# Altium PCB PA_CPLBridgre_R00.PcbDoc
Units mil, origin at the board's own origin, x right, y up, seen from the top; angles counter-clockwise.
Board outline 885.83 x 1760 mil, 2 copper layers (Top Layer, Bottom Layer); 18 components, 13 nets, 62 pads, 242 vias.
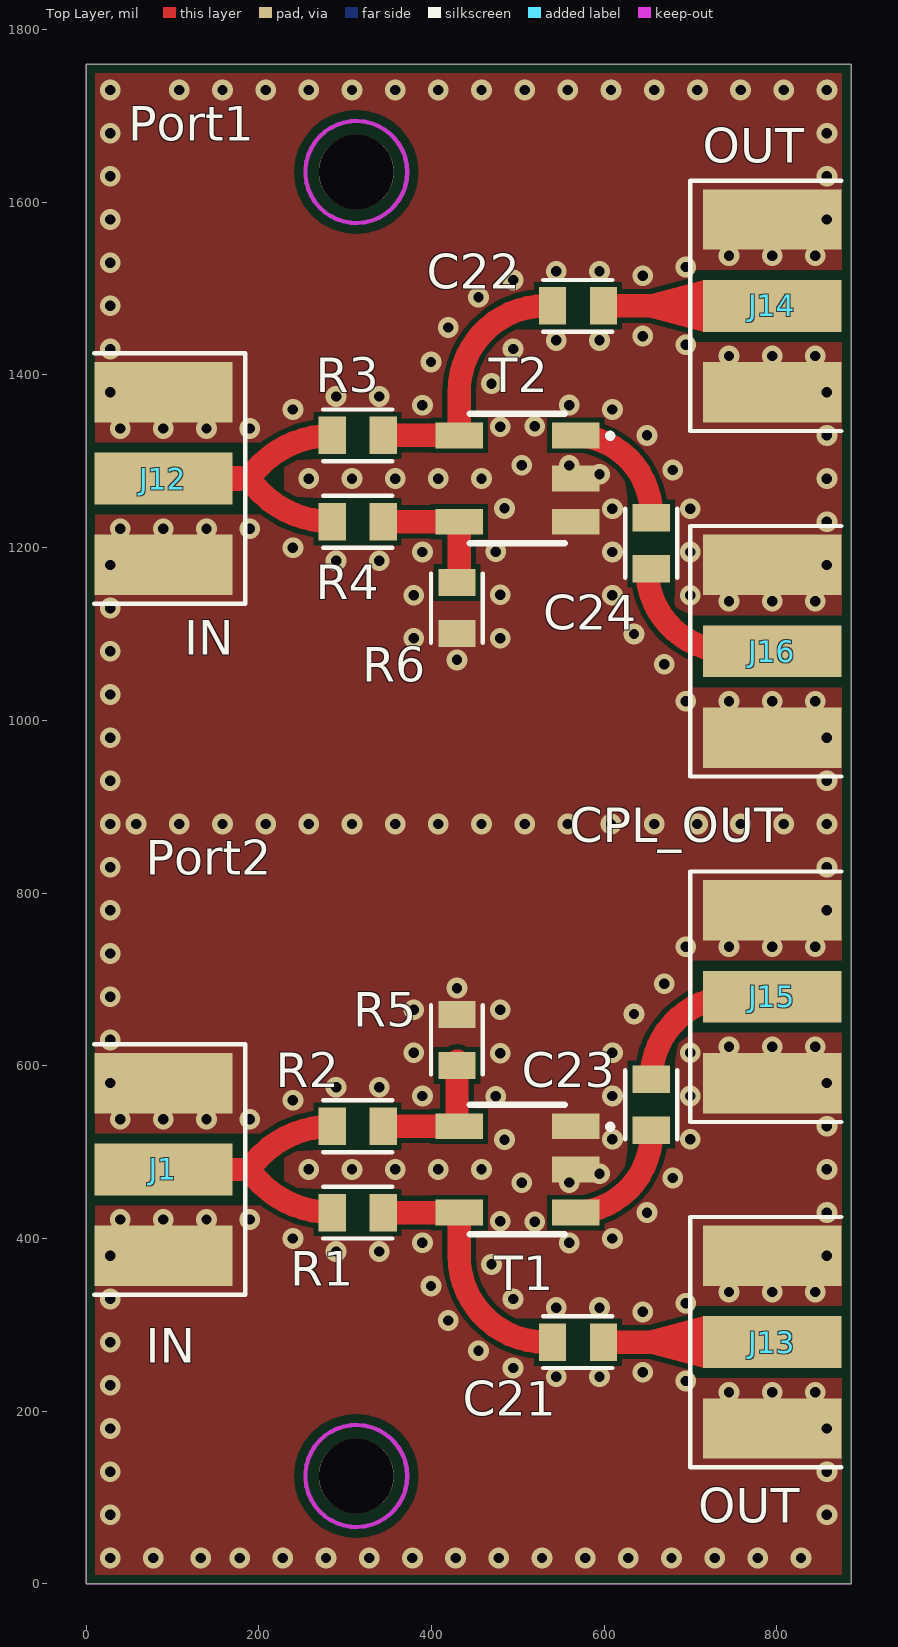
[diagram p0: Top Layer view]
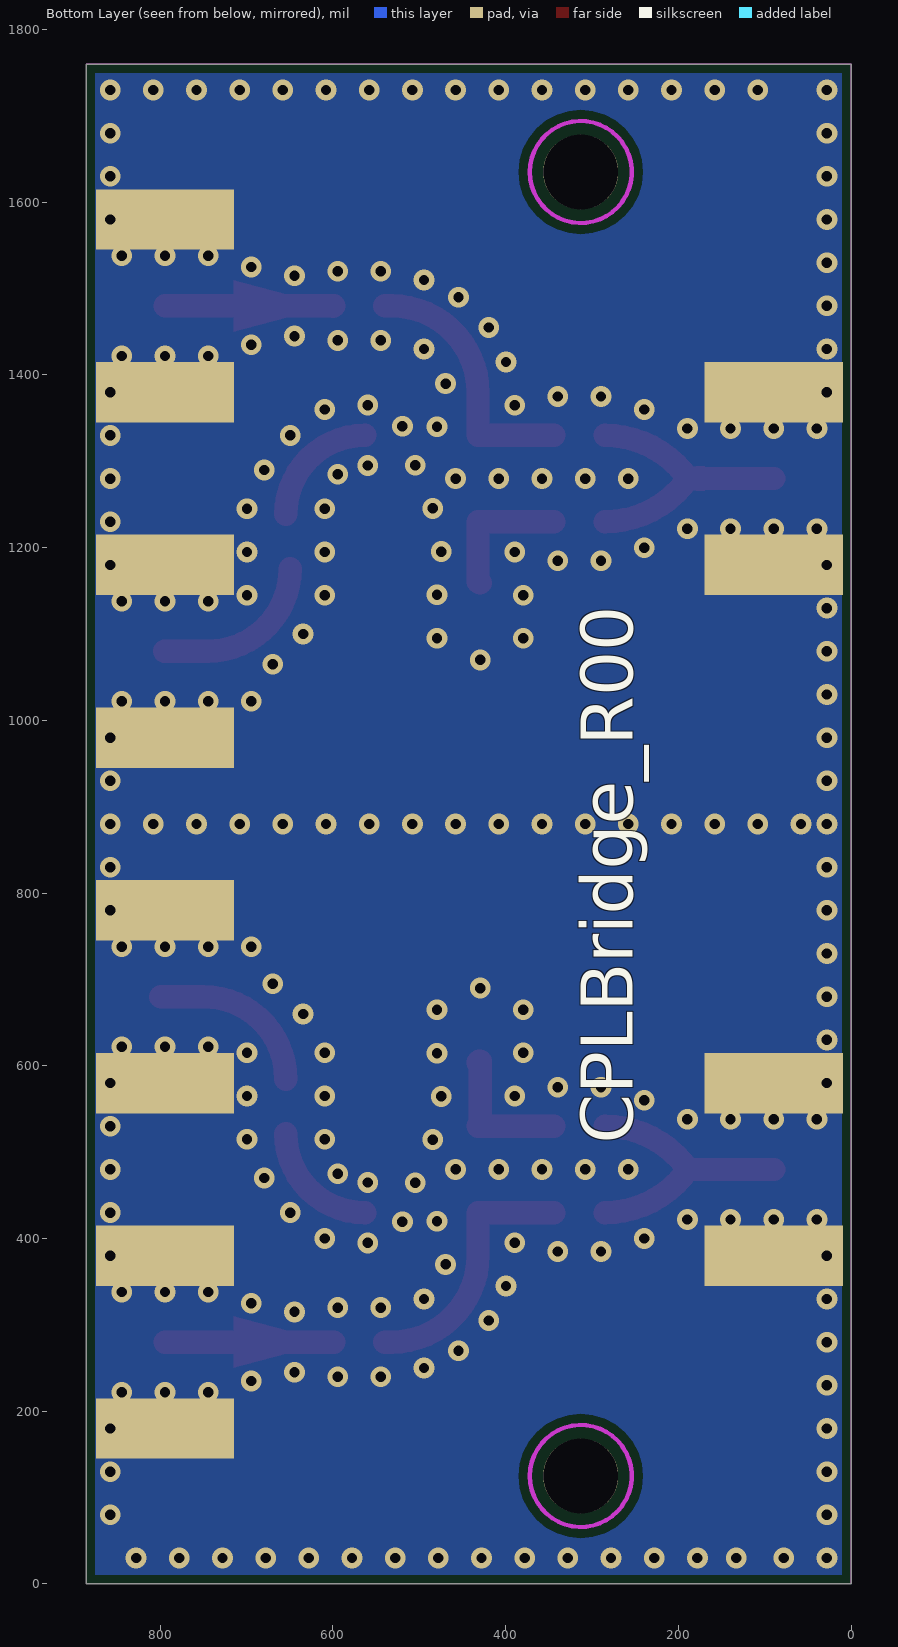
[diagram p1: Bottom Layer view, seen from below]

## Layer stack, top to bottom
Top Solder: solder mask 0.4, Solder Resist, Dk 3.5
Top Layer: signal copper 1.4
Dielectric 1: dielectric 12.6, FR-4, Dk 4.8
Bottom Layer: signal copper 1.4
Bottom Solder: solder mask 0.4, Solder Resist, Dk 3.5

## Board outline
0,0 0,1760 885.83,1760 885.83,0

## Design rules (kind name [scope] priority, off if disabled: settings)
AssemblyTestpoint [All] p1: testpointundercomponent=TRUE minsize=40 maxsize=100 preferedsize=60 minholesize=0 maxholesize=40 preferedholesize=32 testpointgrid=1 usegrid=TRUE gridoriginx=358.41 gridoriginy=0 gridtolerance=0.01 allowsidetop=TRUE allowsidebottom=TRUE
Clearance SMA_Clearance [(HasFootprint('SMA_Connector') AND  Not InNet('GND'))] p1: gap=12 ignorepadtopadclearanceinfootprint=FALSE
Clearance Clearance_1 [OnMid vs OnMid] p2: gap=6 ignorepadtopadclearanceinfootprint=FALSE sourcerule=40 cellrowname=All cellrowtype=0 cellcolname=All cellcoltype=0 innerlayers=TRUE
Clearance Clearance_2 [(ExistsOnLayer('Top Layer') Or ExistsOnLayer('Bottom Layer')) vs (ExistsOnLayer('Top Layer') Or ExistsOnLayer('Bottom Layer'))] p3: gap=6 ignorepadtopadclearanceinfootprint=FALSE sourcerule=40 cellrowname=All cellrowtype=0 cellcolname=All cellcoltype=0 outerlayers=TRUE
Clearance [All] p4: gap=10 ignorepadtopadclearanceinfootprint=FALSE ismatrix=TRUE
FabricationTestpoint [All] p1: side=3 testpointundercomponent=TRUE minsize=40 maxsize=100 preferedsize=60 minholesize=0 maxholesize=40 preferedholesize=32 testpointgrid=1 allowsidetop=TRUE allowsidebottom=TRUE usegrid=TRUE gridoriginx=358.41 gridoriginy=0 gridtolerance=0.01
PolygonConnect PolygonConnectStyle_1 [All] p1: thpad.connectstyle=Relief thpad.reliefconductorwidth=10 thpad.reliefentries=2 thpad.polygonreliefangle="0 Angle" thpad.airgapwidth=10 smdpad.connectstyle=Direct smdpad.reliefconductorwidth=10 smdpad.reliefentries=2 smdpad.polygonreliefangle="0 Angle" smdpad.airgapwidth=10 via.connectstyle=Direct via.reliefconductorwidth=10 via.reliefentries=2 via.polygonreliefangle="0 Angle" via.airgapwidth=10
PolygonConnect [All] p2: thpad.connectstyle=Relief thpad.reliefconductorwidth=10 thpad.reliefentries=4 thpad.polygonreliefangle="90 Angle" thpad.airgapwidth=10 smdpad.connectstyle=Direct smdpad.reliefconductorwidth=10 smdpad.reliefentries=4 smdpad.polygonreliefangle="90 Angle" smdpad.airgapwidth=10 via.connectstyle=Relief via.reliefconductorwidth=10 via.reliefentries=4 via.polygonreliefangle="90 Angle" via.airgapwidth=10
RoutingVias RoutingViaStyle_1 [All] p1: holewidth=12 width=24 viastyle="Through Hole" minholewidth=12 minwidth=24 maxholewidth=50 maxwidth=100
RoutingVias [All] p2: holewidth=28 width=50 viastyle="Through Hole" minholewidth=28 minwidth=50 maxholewidth=28 maxwidth=50
SolderMaskExpansion [All] p1: expansion=4 istentingtop=FALSE
Width MaxMinWidth_1 [All] p1: maxlimit=100 minlimit=6 preferedwidth=27 minimp=50.000000 maximp=50.000000 favimp=50.000000
Width [All] p2: maxlimit=10 minlimit=10 preferedwidth=10
28 further rules are at their usual default settings.

## Components (designator, comment, footprint, x,y, rotation, side; value= is the part's Value field where it differs from the comment)
C21 "100nF - RF" C_0603 569.5,280 r0 top
C22 "100nF - RF" C_0603 569.5,1480 r0 top
C23 "100nF - RF" C_0603 654.5,555 r270 top
C24 "100nF - RF" C_0603 654.5,1205 r90 top
J1 "SMA_Connector" SMA_Connector 89.5,480 r90 top
J12 "SMA_Connector" SMA_Connector 89.5,1280 r90 top
J13 "SMA_Connector" SMA_Connector 794.5,280 r270 top
J14 "SMA_Connector" SMA_Connector 794.5,1480 r270 top
J15 "SMA_Connector" SMA_Connector 794.5,680 r270 top
J16 "SMA_Connector" SMA_Connector 794.5,1080 r270 top
R1 "50R - RF" R_0603 314.5,430 r180 top
R2 "50R - RF" R_0603 314.5,530 r180 top
R3 "50R - RF" R_0603 314.5,1330 r180 top
R4 "50R - RF" R_0603 314.5,1230 r180 top
R5 "50R - RF" R_0603 429.5,630 r270 top
R6 "50R - RF" R_0603 429.5,1130 r90 top
T1 "MABA-007159-000000" MABA-007159-000000_1 499.5,480 r270 top
T2 "MABA-007159-000000" MABA-007159-000000_1 499.5,1280 r270 top

## Footprints (in the part's own frame and the unit in brackets; to place one, negate y for a bottom-side part, rotate by r counter-clockwise, add the part's x,y. Pads: shape width x height; smd on the part's side, far side on the other; paste and mask are expansions set on the pad)
C_0603 [mm] "Chip Capacitor, 2-Leads,"
  rect 0.8x1.1 smd: 1(-0.75,0) 2(0.75,0)
  silkscreen extent -1.02,-0.76 1.02,0.76, body extent -1,-0.62 1,0.63, height 0.78
MABA-007159-000000_1 [mm]
  rect 0.76x1.4 smd: 1(-1.27,1.715) 2(0,1.715) 3(1.27,1.715) 4(1.27,-1.715) 5(-1.27,-1.715)
  silkscreen extent -1.91,-1.4 1.91,2.78, body extent -1.91,-1.91 1.91,1.91, height 2.6
R_0603 [mm] "Chip Resistor, 2-Leads,"
  rect 0.8x1.1 smd: 1(-0.75,0) 2(0.75,0)
  silkscreen extent -1.02,-0.76 1.02,0.76, body extent -0.89,-0.51 0.89,0.51, height 0.25
SMA_Connector [mil] "SMA PCB Connector 1.6mm / PN: EMPCB.CSMAFSTJ.A"
  rect 60x160 smd: 1(0,0)
  rect 70x160 smd: 2(-100,0) 2(100,0)
  rect 70x160 smd far side: 2(-100,0) 2(100,0)
  silkscreen extent -145,-95 145,80, body extent -121,-60 121,80, height 10

## Part data
C21 C22 C23 C24: library part "Ceramic Cap"
J1 J12 J13 J14 J15 J16: "Connector SMA"
R1 R2 R3 R4 R5 R6: library part Res1, "Resistor"
T1 T2: "Transformer", Manufacturer_Name=MACOM, Mouser Part Number=937-MABA007159000000, Datasheet Link=http://cdn.macom.com/datasheets/MABA-007159-000000.pdf, Manufacturer_Part_Number=MABA-007159-000000, Mouser Price/Stock=https://www.mouser.co.uk/ProductDetail/MACOM/MABA-007159-000000?qs=3Wmz%2FrCSAaFBkdkj62uXUA%3D%3D

## Free pads (board coordinates)
  round 86.61 hole 86.61: 4(312.91,125) 4(312.91,1635)

## Via types
v1: diameter 24, hole 12, Top Layer to Bottom Layer, tented both sides, 242 vias

## Nets (pads, with @x,y where several pads share a name; then routed paths per layer and width w, separated by ;. In a path a pad name is that pad's centre, name@x,y a point inside that pad or via, vN(x,y) a via of type N, cw(c..) or ccw(c..) an arc to the next point about the centre after c; other vN are vias at no path point)
GND: J1.2 J12.2 J13.2 J14.2 J15.2 J16.2 R5.1 R6.1 T1.1 T1.2 T2.2 T2.3
  other v1: 27.91,30 77.91,30 132.91,30 177.91,30 227.91,30 277.91,30 327.91,30 377.91,30 427.91,30 477.91,30 527.91,30 577.91,30 627.91,30 677.91,30 727.91,30 777.91,30 827.91,30 27.91,80 857.91,80 27.91,130 857.91,130 27.91,180 857.91,180 744.5,222 794.5,222 844.5,222 27.91,230 694.5,235 544.5,240 594.5,240 644.5,245 494.5,250 454.5,270 27.91,280 419.5,305 644.5,315 544.5,320 594.5,320 694.5,325 27.91,330 494.5,330 744.5,338 794.5,338 844.5,338 399.5,345 469.5,370 27.91,380 857.91,380 289.5,385 339.5,385 389.5,395 559.5,394.91 239.5,400 609.5,400 479.5,420 519.5,419.53 39.5,422 89.5,422 139.5,422 189.5,422 649.5,430 857.91,430 504.5,464.53 559.5,464.91 679.5,470 594.5,475 257.91,480 307.91,480 357.91,480 407.91,480 457.91,480 857.91,480 484.5,514.53 609.5,515 699.5,515 857.91,530 39.5,538 89.5,538 139.5,538 189.5,538 239.5,560 389.5,565 474.5,564.53 609.5,565 699.5,565 289.5,575 339.5,575 27.91,580 857.91,580 379.5,615 479.5,614.53 609.5,615 699.5,615 744.5,622 794.5,622 844.5,622 27.91,630 634.5,660 379.5,665 479.5,665 27.91,680 429.5,690 669.5,695 27.91,730 694.5,738 744.5,738 794.5,738 844.5,738 27.91,780 857.91,780 27.91,830 857.91,830 27.91,880 57.91,880 107.91,880 157.91,880 207.91,880 257.91,880 307.91,880 357.91,880 407.91,880 457.91,880 507.91,880 557.91,880 607.91,880 657.91,880 707.91,880 757.91,880 807.91,880 857.91,880 27.91,930 857.91,930 27.91,980 857.91,980 694.5,1022 744.5,1022 794.5,1022 844.5,1022 27.91,1030 669.5,1065 429.5,1070 27.91,1080 379.5,1095 479.5,1095 634.5,1100 27.91,1130 744.5,1138 794.5,1138 844.5,1138 379.5,1145 609.5,1145 699.5,1145 479.5,1145.47 27.91,1180 857.91,1180 289.5,1185 339.5,1185 389.5,1195 609.5,1195 699.5,1195 474.5,1195.47 239.5,1200 39.5,1222 89.5,1222 139.5,1222 189.5,1222 857.91,1230 609.5,1245 699.5,1245 484.5,1245.47 257.91,1280 307.91,1280 357.91,1280 407.91,1280 457.91,1280 857.91,1280 594.5,1285 679.5,1290 559.5,1295.09 504.5,1295.47 649.5,1330 857.91,1330 39.5,1338 89.5,1338 139.5,1338 189.5,1338 479.5,1340 519.5,1340.47 239.5,1360 609.5,1360 389.5,1365 559.5,1365.09 289.5,1375 339.5,1375 27.91,1380 857.91,1380 469.5,1390 399.5,1415 744.5,1422 794.5,1422 844.5,1422 27.91,1430 494.5,1430 694.5,1435 544.5,1440 594.5,1440 644.5,1445 419.5,1455 27.91,1480 454.5,1490 494.5,1510 644.5,1515 544.5,1520 594.5,1520 694.5,1525 27.91,1530 744.5,1538 794.5,1538 844.5,1538 27.91,1580 857.91,1580 27.91,1630 857.91,1630 27.91,1680 857.91,1680 27.91,1730 107.91,1730 157.91,1730 207.91,1730 257.91,1730 307.91,1730 357.91,1730 407.91,1730 457.91,1730 507.91,1730 557.91,1730 607.91,1730 657.91,1730 707.91,1730 757.91,1730 807.91,1730 857.91,1730
NetC21_1: C21.1 R1.1 T1.4 | length 303
  Top Layer w27: R1.1 T1.4 431.98,380 ccw(c531.98,380) 531.98,280 C21.1
NetC21_2: C21.2 J13.1 | length 195.5
  Top Layer w27: C21.2 J13.1
NetC22_1: C22.1 R3.1 T2.5 | length 303
  Top Layer w27: R3.1 T2.5 431.98,1380 cw(c531.98,1380) 531.98,1480 C22.1
NetC22_2: C22.2 J14.1 | length 196.1
  Top Layer w27: C22.2@599.47,1479.56 C22.2 J14.1
NetC23_1: C23.1 J15.1 | length 199.5
  Top Layer w27: C23.1 cw(c749.97,584.53) 749.97,680 J15.1@799.5,680
NetC23_2: C23.2 T1.3 | length 143.8
  Top Layer w27: T1.3@563.02,429.91 ccw(c563.02,521.48) C23.2@654.59,521.48
NetC24_1: C24.1 J16.1 | length 200
  Top Layer w27: C24.1@649.5,1175.47 ccw(c744.97,1175.47) 744.97,1080 J16.1@794.97,1080
NetC24_2: C24.2 T2.1 | length 143.8
  Top Layer w27: T2.1@563.02,1330.09 cw(c563.02,1238.52) C24.2@654.59,1238.52
NetJ1_1: J1.1 R1.2 R2.2 | length 324.6
  Top Layer w27: J1.1 188.85,480 ; R1.2 cw(c284.97,547.39) 188.85,480 ; R2.2 ccw(c284.97,412.61) 188.85,480
NetJ12_1: J12.1 R3.2 R4.2 | length 324.6
  Top Layer w27: J12.1 188.85,1280 ; R4.2 cw(c284.97,1347.39) 188.85,1280 ; R3.2 ccw(c284.97,1212.61) 188.85,1280
NetR2_1: R2.1 R5.2 T1.5 | length 168.7
  Top Layer w27: R2.1 429.5,530 T1.5 cw(c431.98,532.48) 429.5,532.48 R5.2 429.5,602.99 429.5,605.47 cw(c429.5,602.99) R5.2@431.98,602.99
NetR4_1: R4.1 R6.2 T2.4 | length 159.8
  Top Layer w27: R4.1 T2.4 431.98,1162.01 cw(c429.5,1162.01) R6.2

## Polygon pours and split planes (outlines as drawn)
GND on Bottom Layer "GND_BOT" (solid, pour order 1): 10.71,1760 875.12,1760 875.12,0 10.71,0
GND on Top Layer "GND_TOP" (solid, pour order 0): 0,1760 885.83,1760 885.83,0 0,0

## Keep-outs
Keep-Out Layer:
  circle w5: c312.91,125 r59.06
  circle w5: c312.91,1635 r59.06
  lines w1: 0,0 0,1760 885.83,1760 885.83,0 0,0

## Silkscreen, mask and mechanical layers (free items; w line width, h text height)
Top Overlay:
  text "Port1" at 48.91,1671 h40
  text "OUT" at 713.91,1646 h40
  text "IN" at 113.91,1076 h40
  text "CPL_OUT" at 559.91,858.66 h40
  text "Port2" at 68.91,821 h40
  text "IN" at 68.91,256 h40
  text "OUT" at 708.91,71 h40
Bottom Overlay:
  text "CPLBridge_R00" at 252.91,510 h60 r270
Mechanical 1:
  the board outline again, w10
Mechanical 12 (Mech12):
  lines w1: 0,880 885.83,880 ; 442.91,92.6 442.91,1667.4

## Dimensions
0,1760 to 0,0 on Mechanical 12 (Mech12)
885.83,1760 to 0,1760 on Mechanical 12 (Mech12)